# Altium PCB pcb.PcbDoc
Units mil, origin at the board's own origin, x right, y up, seen from the top; angles counter-clockwise.
Board outline 3149.61 x 1574.8 mil, 2 copper layers (Top Layer, Bottom Layer); 55 components, 39 nets, 228 pads, 50 vias.
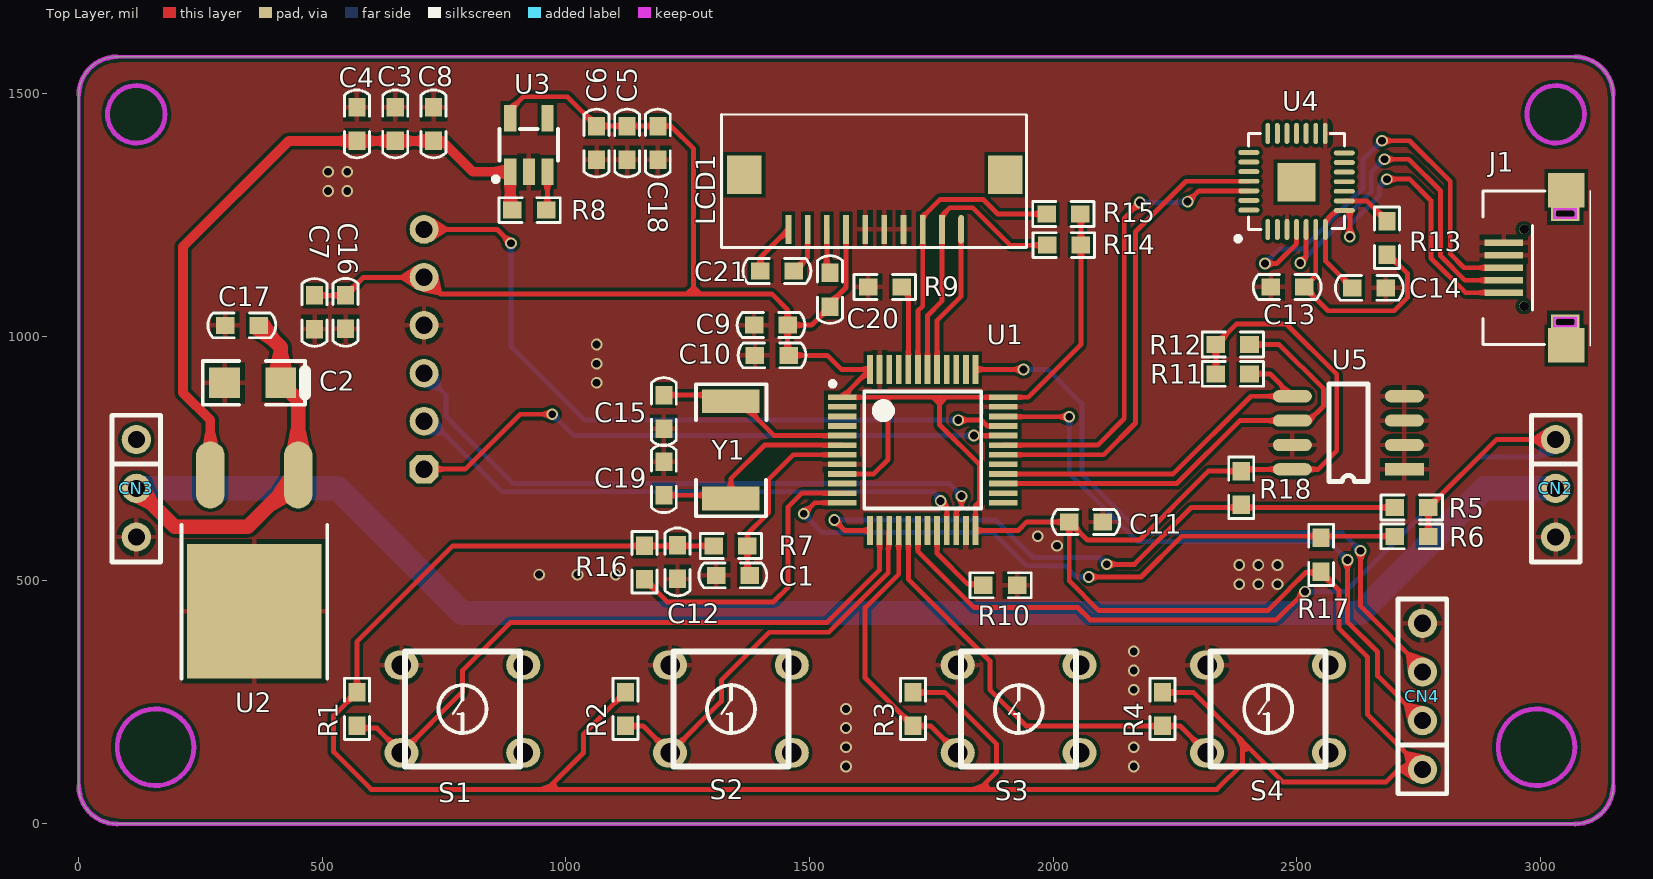
[diagram p0: Top Layer view]
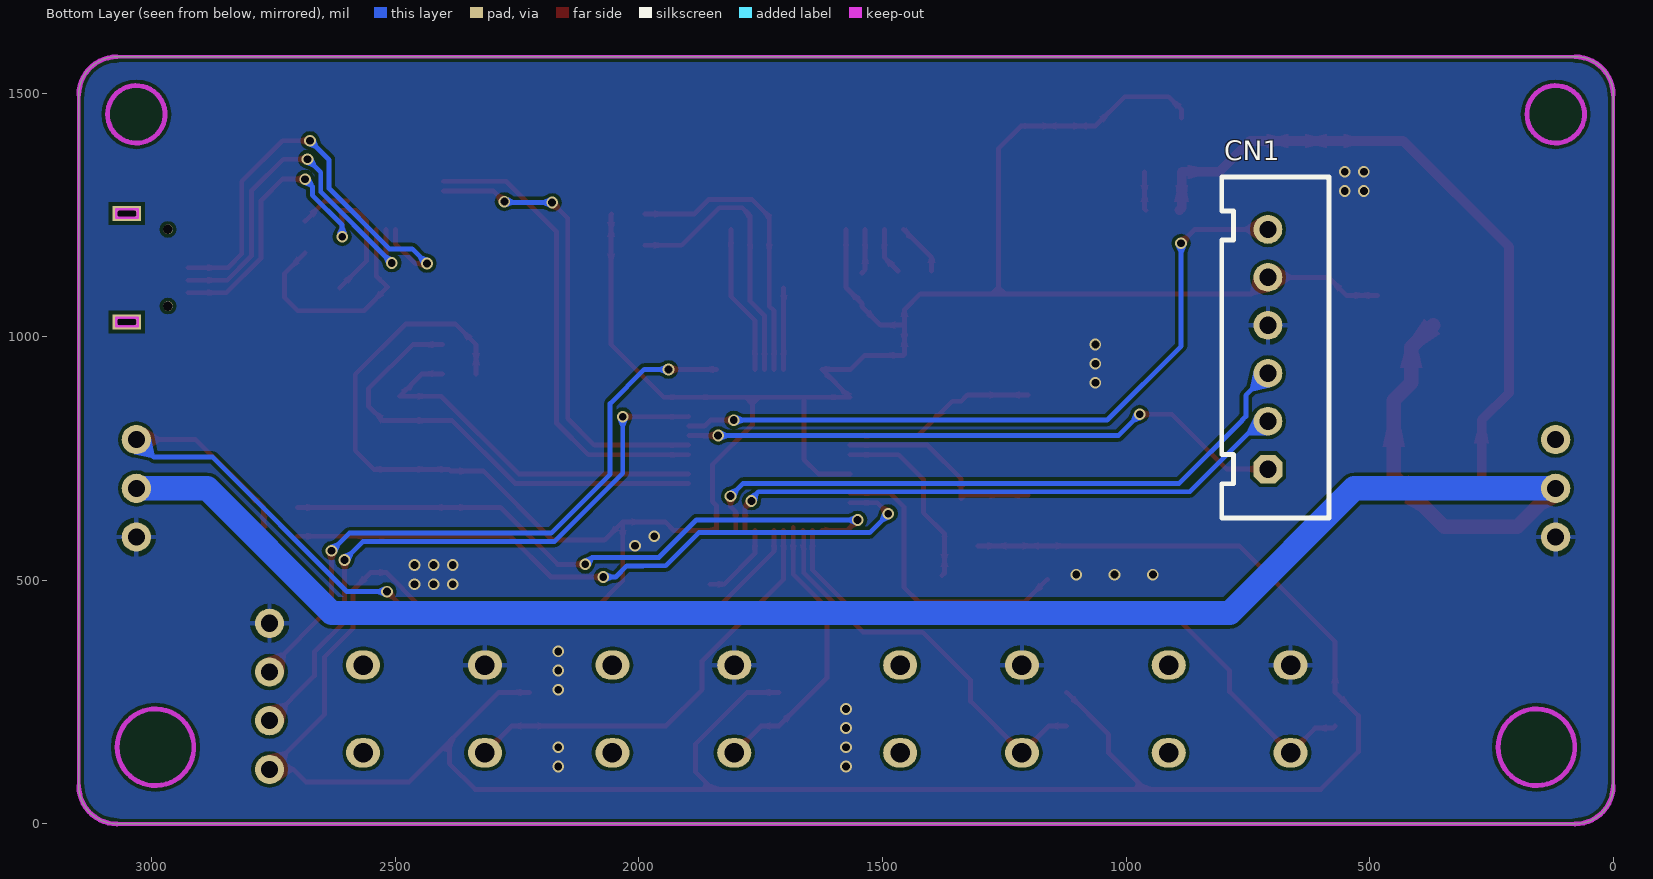
[diagram p1: Bottom Layer view, seen from below]
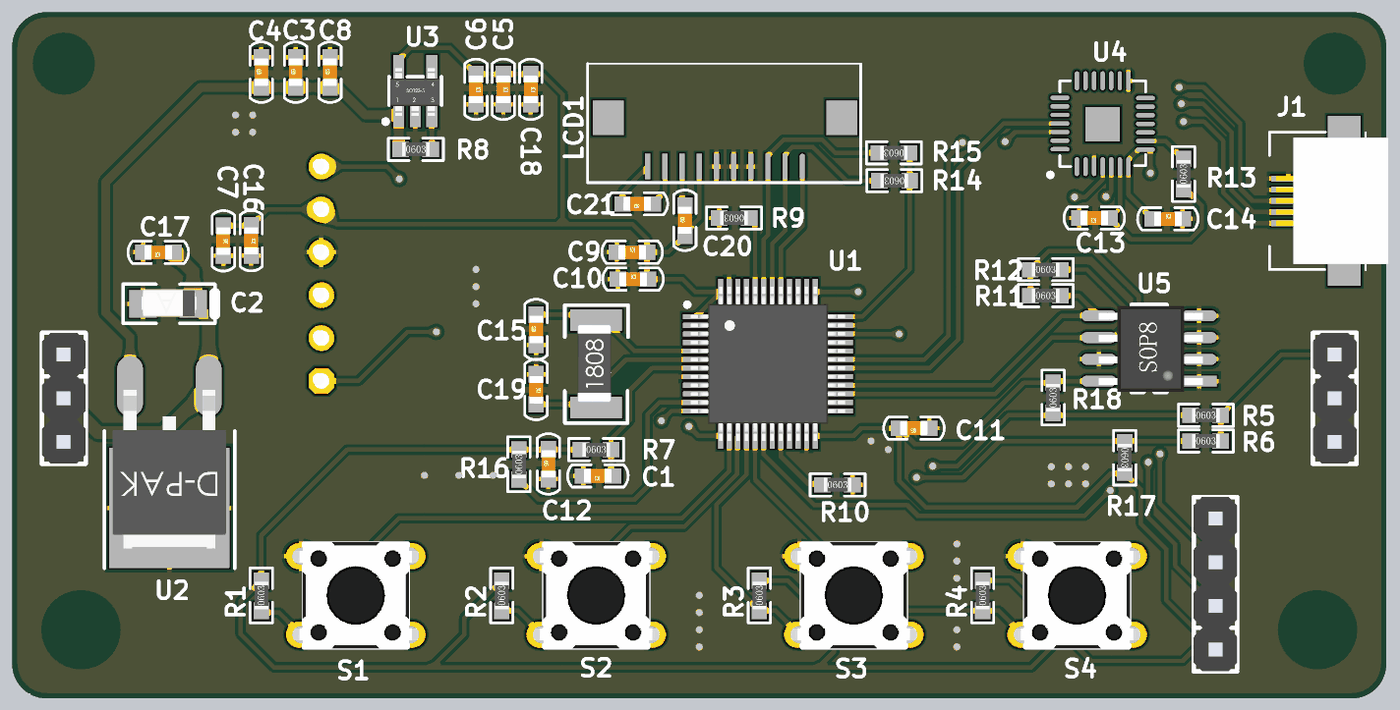
[diagram p2: 3D render of the assembled board from above, using the file's embedded part models]

## Layer stack, top to bottom
Top Solder: solder mask 0.4, Solder Resist, Dk 3.5
Top Layer: signal copper 1.4
Dielectric1: dielectric 12.6, FR-4, Dk 4.8
Bottom Layer: signal copper 1.4
Bottom Solder: solder mask 0.4, Solder Resist, Dk 3.5

## Board outline
0,78.74 ccw(c78.74,78.74) 78.74,0 3070.87,0 ccw(c3070.87,78.74) 3149.61,78.74 3149.61,1496.06 ccw(c3070.87,1496.06) 3070.87,1574.8 78.74,1574.8 ccw(c78.74,1496.06) 0,1496.06

## Design rules (kind name [scope] priority, off if disabled: settings)
Clearance [All] p1: gap=7
ComponentClearance [All] p1: gap=0 collisioncheckmode=3 verticalgap=0 showdistances=TRUE
PlaneConnect PlaneConnect_3 [InNet('VBAT')] p1: planeconnectstyle=Direct reliefexpansion=20 reliefentries=4 reliefconductorwidth=10 reliefairgap=10
PlaneConnect PlaneConnect_2 [InNet('GND')] p2: planeconnectstyle=Direct reliefexpansion=20 reliefentries=4 reliefconductorwidth=10 reliefairgap=10
PlaneConnect PlaneConnect_1 [InNet('VCC3V3')] p3: planeconnectstyle=Direct reliefexpansion=20 reliefentries=4 reliefconductorwidth=10 reliefairgap=10
PlaneConnect [All] p4: planeconnectstyle=Relief reliefexpansion=20 reliefentries=4 reliefconductorwidth=10 reliefairgap=10
PolygonConnect PolygonConnect_2 [IsVia] p1: connectstyle=Direct reliefconductorwidth=10 reliefentries=4 polygonreliefangle="90 Angle" airgapwidth=10
PolygonConnect PolygonConnect_1 [All vs InNet('VBAT')] p2: connectstyle=Direct reliefconductorwidth=10 reliefentries=4 polygonreliefangle="90 Angle" airgapwidth=10
PolygonConnect [All] p3: connectstyle=Relief reliefconductorwidth=10 reliefentries=4 polygonreliefangle="90 Angle" airgapwidth=10
RoutingVias [All] p1: holewidth=28 width=50 viastyle="Through Hole" minholewidth=16 minwidth=50 maxholewidth=28 maxwidth=50
SilkToSolderMaskClearance SilkscreenOverComponentPads [IsPad] p1: minsilkscreentomaskgap=10 clearancetoexposedcopper=TRUE
SolderMaskExpansion [All] p1: expansion=4
Width [All] p1: maxlimit=50 minlimit=10 preferedwidth=10
27 further rules are at their usual default settings.

## Components (designator, comment, footprint, x,y, rotation, side; value= is the part's Value field where it differs from the comment)
C1 "0.1uF" CAP-0603 1342.39,510.39 r180 top
C2 "10uF" CAP-A 354.33,905.51 r180 top
C3 "0.1uF" CAP-0603 649.61,1437.01 r90 top
C4 "0.1uF" CAP-0603 570.87,1437.01 r90 top
C5 "0.1uF" CAP-0603 1125.73,1397.64 r270 top
C6 "0.1uF" CAP-0603 1062.99,1397.64 r270 top
C7 "0.33uF" CAP-0603 334.65,1023.62 r180 top
C8 "0.1uF" CAP-0603 728.35,1437.01 r90 top
C9 "0.1uF" CAP-0603 1421,1024 r0 top
C10 "0.1uF" CAP-0603 1423,962 r0 top
C11 "0.1uF" CAP-0603 2067,620 r180 top
C12 "0.1uF" CAP-0603 1229,538 r90 top
C13 "0.1uF" CAP-0603 2480.32,1102.36 r180 top
C14 "0.1uF" CAP-0603 2648.98,1100.52 r0 top
C15 "22P" CAP-0603 1200.79,846.46 r90 top
C16 "0.1uF" CAP-0603 547.73,1050.3 r270 top
C17 "0.1uF" CAP-0603 484,1050 r270 top
C18 "0.1uF" CAP-0603 1188.47,1397.64 r270 top
C19 "22P" CAP-0603 1200.79,708.66 r270 top
C20 "0.1uF" CAP-0603 1542,1097 r90 top
C21 "1uF" CAP-0603 1433,1135 r180 top
CN1 "CN-6" CN-6 708.66,728.35 r90 bottom locked
CN2 "CN-3" IDC-3×1 3031.5,688.98 r90 top
CN3 "CN-3" IDC-3×1 118.11,688.98 r90 top
CN4 "CN-4" IDC-4×1 2758,112 r270 top
J1 "USB-micro" USB-MICRO 3031.5,1141.73 r90 top
LCD1 "LCD1602_I2C" LCD-IIC 1633.86,1417.32 r180 top locked
R1 "10K" RES-0603 570.87,236.22 r90 top
R2 "10K" RES-0603 1122.05,236.22 r90 top
R3 "10K" RES-0603 1712.6,236.22 r90 top
R4 "10K" RES-0603 2224.41,236.22 r90 top
R5 "120R" RES-0603 2736.22,649.61 r0 top
R6 "0R" RES-0603 2736.22,590.55 r0 top
R7 "10K" RES-0603 1338.58,570.87 r0 top
R8 "200K" RES-0603 925.2,1259.84 r0 top
R9 "10K" RES-0603 1654.54,1102.36 r180 top
R10 "10K" RES-0603 1892,490 r0 top
R11 "10K" RES-0603 2369,984 r0 top
R12 "10K" RES-0603 2369,924 r0 top
R13 "4.7K" RES-0603 2684.98,1203.52 r90 top
R14 "10K" RES-0603 2022,1188 r180 top
R15 "10K" RES-0603 2021,1252 r180 top
R16 "2K" RES-0603 1161.42,537.18 r90 top
R17 "3K" RES-0603 2550.09,552.24 r270 top
R18 "10K" RES-0603 2386.09,690.24 r90 top
S1 "KEY" KEY-6A 787.4,236.22 r0 top locked
S2 "KEY" KEY-6A 1338.58,236.22 r0 top locked
S3 "KEY" KEY-6A 1929.13,236.22 r0 top locked
S4 "KEY" KEY-6A 2440.94,236.22 r0 top locked
U1 "STM32F103C" LQFP-48 1732.28,767.72 r0 top locked
U2 "L7805" TO-252 360.33,531.5 r270 top
U3 "spx6205" SOT-23(5) 885.83,1338.58 r0 top
U4 "CP2102" QFN-28 2401.57,1417.32 r0 top
U5 "AT24C128" SOP-8(3.9) 2721,728 r180 top
Y1 "8MHZ" XTAL-2512 1338.58,767.72 r90 top

## Footprints (in the part's own frame and the unit in brackets; to place one, negate y for a bottom-side part, rotate by r counter-clockwise, add the part's x,y. Pads: shape width x height; smd on the part's side, far side on the other; paste and mask are expansions set on the pad)
CAP-0603 [mil]
  rect 38x35 smd: 1(-35,0) 2(34,0)
  silkscreen extent -70,-26 70,26, body extent -31,-16 32,16, height 12
CAP-A [mm]
  rect 1.6x1.6 smd: 1(-1.524,0) 2(1.397,0)
  silkscreen extent -2.79,-1.14 2.54,1.14, body extent -1.73,-0.84 1.47,0.76, height 1.6
CN-6 [mm]
  oct 1.5x1.5 hole 0.9: 1(0,0)
  round 1.5 hole 0.9: 2(2.5,0) 3(5,0) 4(7.5,0) 5(10,0) 6(12.5,0)
  silkscreen extent -2.54,-3.18 15.24,2.41, body extent -2.4,-1.77 15.1,2.03, height 6
IDC-3×1 [mil]
  round 60 hole 35: 1(100,0) 2(0,0) 3(-100,0)
  silkscreen extent -151,-50 150,50, body extent -150,-50 150,50, height 315
IDC-4×1 [mil]
  round 60 hole 35: 1(0,0) 2(-100,0) 3(-200,0) 4(-300,0)
  silkscreen extent -350,-50 50,50, body extent -350,-50 50,50, height 315
KEY-6A [mil]
  oval 70x60 hole 40: 1(-125,90) 2(-125,-90) 3(125,-90) 4(125,90)
  silkscreen extent -118,-118 118,118, body extent -153,-122 152,122, height 273
LCD-IIC [mm]
  rect 1.8x2 smd: 0(-6.8,2.15) 0(6.8,2.15)
  oval 0.3x1.5 smd: 1(-4.5,5)
  rect 0.3x1.5 smd: 2(-3.5,5) 3(-2.5,5) 4(-1.5,5) 5(-0.5,5) 6(0.5,5) 7(1.5,5) 8(2.5,5) 9(3.5,5) 10(4.5,5)
  silkscreen extent -7.92,-1 8,5.94
LQFP-48 [mm]
  rect 1.5x0.3 smd: 1(-4.2,2.75) 2(-4.2,2.25) 3(-4.2,1.75) 4(-4.2,1.25) 5(-4.2,0.75) 6(-4.2,0.25) 7(-4.2,-0.25) 8(-4.2,-0.75) 9(-4.2,-1.25) 10(-4.2,-1.75) 11(-4.2,-2.25) 12(-4.2,-2.75) 25(4.2,-2.75) 26(4.2,-2.25) 27(4.2,-1.75) 28(4.2,-1.25) 29(4.2,-0.75) 30(4.2,-0.25) 31(4.2,0.25) 32(4.2,0.75) 33(4.2,1.25) 34(4.2,1.75) 35(4.2,2.25) 36(4.2,2.75)
  rect 0.3x1.5 smd: 13(-2.75,-4.2) 14(-2.25,-4.2) 15(-1.75,-4.2) 16(-1.25,-4.2) 17(-0.75,-4.2) 18(-0.25,-4.2) 19(0.25,-4.2) 20(0.75,-4.2) 21(1.25,-4.2) 22(1.75,-4.2) 23(2.25,-4.2) 24(2.75,-4.2) 37(2.75,4.2) 38(2.25,4.2) 39(1.75,4.2) 40(1.25,4.2) 41(0.75,4.2) 42(0.25,4.2) 43(-0.25,4.2) 44(-0.75,4.2) 45(-1.25,4.2) 46(-1.75,4.2) 47(-2.25,4.2) 48(-2.75,4.2)
  silkscreen extent -4.82,-3.05 3.05,3.57, body extent -4.5,-4.5 4.5,4.5, height 1.2
QFN-28 [mil]
  rect 78.74x78.74 smd: 0(98,-100)
  oval 10x43.31 smd: 1(39,-197) 2(58.69,-197) 3(78.37,-197) 4(98.06,-197) 5(117.74,-197) 6(137.43,-197) 7(157.11,-197) 15(157,0) 16(137.32,0) 17(117.63,0) 18(97.94,0) 19(78.26,0) 20(58.57,0) 21(38.89,0)
  oval 43.31x10 smd: 8(196,-158) 9(196,-138.31) 10(196,-118.63) 11(196,-98.94) 12(196,-79.26) 13(196,-59.57) 14(196,-39.89) 22(0,-39) 23(0,-58.68) 24(0,-78.37) 25(0,-98.06) 26(0,-117.74) 27(0,-137.43) 28(0,-157.11)
  silkscreen extent -27,-221 197,0, body extent 1,-195 197,1, height 59
RES-0603 [mil] "1/10W"
  rect 38x35 smd: 1(-35,0) 2(34,0)
  silkscreen extent -63,-26 63,26, body extent -31,-16 31,16, height 18
SOP-8(3.9) [mil]
  rect 80x25 smd: 1(0,0)
  oval 80x25 smd: 2(0,-50) 3(0,-100) 4(0,-150) 5(230,-150) 6(230,-100) 7(230,-50) 8(230,0)
  silkscreen extent 75,-175 155,25, body extent -8,-173 230,25, height 63
SOT-23(5) [mil]
  rect 25x55 smd: 1(0,0) 2(38,0) 3(76,0) 4(76,110) 5(0,110)
  silkscreen extent -35,-20 98,88, body extent -20,-2 94,108, height 43
TO-252 [mm] "D-PAK  / SOT-428"
  oval 3.5x1.5 smd: 1(-4.699,2.286) 3(-4.699,-2.294)
  rect 7x7 smd: 2(2.405,-0.004)
  silkscreen extent -2.08,-3.79 5.92,3.81, body extent -4.47,-3.3 4.78,3.3, height 2.31
USB-MICRO [mm]
  rect 0.35x2 smd: 1(-1.3,2.7) 2(-0.65,2.7) 3(0,2.7) 4(0.65,2.7) 5(1.3,2.7)
  rect 1.8x1.9 smd: 6(-4.05,-0.55) 6(4.05,-0.55)
  rect 0.8x1.5 hole 0.4 slot 1 at 90 deg: 6(-2.825,-0.5) 6(2.825,-0.5)
  round 0.5 hole 0.5 unplated: ""(-2,1.65) ""(2,1.65)
  Keep-Out Layer lines w0.127: -3.054,0.075 -3.054,-1.043 -2.596,-1.043 -2.596,0.075 -3.054,0.075 ; 2.596,0.075 2.596,-1.043 3.054,-1.043 3.054,0.075 2.596,0.075
  silkscreen extent -4.05,-1.8 4,3.8, body extent -3.69,-3.1 3.69,3.4, height 3.3
XTAL-2512 [mm]
  rect 1.25x3 smd: 1(-2.54,0) 2(2.54,0)
  silkscreen extent -3.45,-1.85 3.43,1.83, body extent -2.24,-0.86 2.28,1.08, height 1

## Part data
C1 C3 C4 C5 C6 C7 C8 C9 C10 C11 C12 C13 C14 C15 C16 C17 C18 C19 C20 C21: library part CAP, "Capacitor"
C2: library part CAP(POL), "Polar Capacitor"
LCD1: "LCD1602"
R1 R2 R3 R4 R5 R6 R7 R8 R9 R10 R11 R12 R13 R14 R15 R16 R17 R18: library part RES, "Resistor"
U1: library part STM32F103C(LQFP)
U2: library part 78XX
U3: library part SP6205(FIXED)
U4: library part MPU6050_1
Y1: library part XTAL(1), "Crystal"

## Via types
v1: diameter 24, hole 16, Top Layer to Bottom Layer, tented both sides, 50 vias

## Nets (pads, with @x,y where several pads share a name; then routed paths per layer and width w, separated by ;. In a path a pad name is that pad's centre, name@x,y a point inside that pad or via, vN(x,y) a via of type N, cw(c..) or ccw(c..) an arc to the next point about the centre after c; other vN are vias at no path point)
ADC8: CN2.1 R5.2 R6.2 U1.18 | length 1941.4
  Top Layer w10: U1.18 1722.44,559.56 1838,444 2051,444 2076,419 2458,419 2516,477 v1(2517,477) ; R6.2 R5.2 2909.59,788.98 CN2.1
  Bottom Layer w10: v1(2517,477) 2599,477 2875,753 2995.52,753 CN2.1
BLE-KEY: CN1.6 U1.33 | length 1479.7
  Top Layer w10: CN1.6 858.53,1220.47 v1(887,1192) ; v1(1805,829) 1852.85,829 1864.92,816.93 U1.33
  Bottom Layer w10: v1(887,1192) 887,981 1039,829 v1(1805,829)
BLE-RX: CN1.2 U1.21 | length 1197.3
  Top Layer w10: v1(1769,663) 1782,650 1782,602.87 U1.21
  Bottom Layer w10: CN1.2 724.23,826.77 869,682 1755,682 1769,668 v1(1769,663)
BLE-S: CN1.1 U1.32 | length 1253.8
  Top Layer w10: CN1.1 793.35,728.35 906,841 v1(972,841) ; v1(1837.24,797.24) U1.32
  Bottom Layer w10: v1(972,841) 1015.76,797.24 v1(1837.24,797.24)
BLE-TX: CN1.3 U1.22 | length 1308.6
  Top Layer w10: U1.22 1801.18,641.18 1812,652 v1(1812,673)
  Bottom Layer w10: CN1.3 754,879.86 754,836.78 762.05,828.72 762.05,827.95 891,699 1786,699 v1(1812,673)
BOOT0: R9.1 U1.44 | length 167.7
  Top Layer w10: U1.44 R9.1@1702.76,1100.76
BOOT1: R10.1 U1.20 | length 165.5
  Top Layer w10: U1.20 1761.81,555.19 1824.87,492.13 R10.1@1854,492.13
CP2102-RX: U1.30 U4.25 | length 966.4
  Top Layer w10: U1.30 2103.87,757.87 2169,823 2169,1215.54 2272.73,1319.27 U4.25
CP2102-TX: U1.31 U4.26 | length 961.6
  Top Layer w10: U1.31 2091.22,777.56 2146,832.34 2146,1243.58 v1(2177.98,1275.56) ; v1(2275.98,1277.52) 2276.98,1277.52 2299.05,1299.58 U4.26
  Bottom Layer w10: v1(2177.98,1275.56) 2275.03,1275.56 2275.98,1276.52 v1(2275.98,1277.52)
EE-SCL: R11.2 U1.27 U5.6 | length 948
  Top Layer w10: U1.27 2253.82,698.82 2383,828 U5.6 2525,828 2555,858 2555,893 2464,984 R11.2
EE-SDA: R12.2 U1.28 U5.5 | length 766.5
  Top Layer w10: U1.28 2246.5,718.5 2406,878 U5.5 2445,924 R12.2
GND: C1.2 C2.2 C3.2 C4.2 C5.2 C6.2 C7.2 C8.2 C9.1 C10.1 C11.1 C12.1 C13.2 C14.2 C15.1 C16.2 C17.2 C18.2 C19.1 CN1.4 CN2.3 CN3.3 CN4.4 J1.4 J1.5 LCD1.4 LCD1.5 LCD1.6 R9.2 R10.2 S1.1 S2.1 S3.1 S4.1 U1.8 U1.23 U1.35 U1.47 U2.2 U3.2 U4.3 U4.15 U5.1 U5.2 U5.3 U5.4 U5.7
  other v1: 1574.8,118.11 2165.35,118.11 1574.8,157.48 2165.35,157.48 1574.8,196.85 1574.8,236.22 2165.35,275.59 2165.35,314.96 2165.35,354.33 2381.89,492.13 2421.26,492.13 2460.63,492.13 944.88,511.81 1023.62,511.81 1102.36,511.81 2381.89,531.5 2421.26,531.5 2460.63,531.5 2008,571 1968.5,590.55 1062.99,905.51 1062.99,944.88 1062.99,984.25 511.81,1299.21 551.18,1299.21 511.81,1338.58 551.18,1338.58
KEY1: R1.1 S1.2 U1.14 | length 1357.5
  Top Layer w10: R1.1 575.24,196.85 611.77,196.85 S1.2 787.4,271.22 787.4,314.96 885.83,413.39 1535.43,413.39 1643.7,521.65 U1.14
KEY2: R2.1 S2.2 U1.15 | length 828.5
  Top Layer w10: R2.1 1158.58,201.22 S2.2 1318.9,251.54 1318.9,295.28 1417.32,393.7 1539.79,393.7 1661.61,515.52 1661.61,600.58 U1.15
KEY3: R3.1 S3.2 U1.16 | length 590.9
  Top Layer w10: U1.16@1683.07,608.46 U1.16 1683.07,512.94 1614.17,444.04 1614.17,299.65 R3.1 1749.13,201.22 S3.2
KEY4: R4.1 S4.2 U1.17 | length 895.5
  Top Layer w10: U1.17 1702.76,501.97 1870.08,334.65 1870.08,275.59 1944.45,201.22 R4.1 2260.94,201.22 S4.2
LCD-RESET: LCD1.1 U1.41 | length 307.8
  Top Layer w10: U1.41 1761.81,1033.81 1811.02,1083.02 LCD1.1
LCD-SCL: LCD1.2 R14.2 U1.42 | length 582.8
  Top Layer w10: U1.42 1742.13,1043.42 1771.65,1072.95 LCD1.2 1771.65,1248.65 1788,1265 1835,1265 1912,1188 R14.2
LCD-SDA: LCD1.3 R15.2 U1.43 | length 599.2
  Top Layer w10: U1.43 1722.44,1053.15 1732.28,1062.99 LCD1.3 1732.28,1246.28 1768,1282 1856,1282 1886,1252 R15.2
NetC1_1: C1.1 R7.2 U1.7 | length 388.8
  Top Layer w10: C1.1 1372.58,515.2 R7.2 1372.58,595.58 1416,639 1416,707.34 1466.54,757.87 U1.7
NetC13_1: C13.1 R13.1 U4.6 | length 481.1
  Top Layer w10: U4.6 2539,1124.54 2516.83,1102.36 C13.1 2564.16,1053.52 2699.98,1053.52 2726.98,1080.52 2726.98,1130.52 R13.1@2684.98,1172.52
NetC20_2: C20.2 LCD1.8 | length 92.2
  Top Layer w10: LCD1.8 1535.43,1137.57 C20.2
NetC21_1: C21.1 LCD1.9 | length 97.1
  Top Layer w10: C21.1 1496.06,1163.06 LCD1.9
NetC21_2: C21.2 LCD1.10 | length 109.4
  Top Layer w10: C21.2 1399,1162.78 LCD1.10
NetJ1_2: J1.2 U4.5 | length 784.9
  Top Layer w10: v1(2506.98,1151.52) 2519.32,1163.85 U4.5 ; v1(2679.98,1364.52) 2729.97,1364.52 2795.28,1299.21 2795.28,1165.77 2844.91,1116.14 J1.2
  Bottom Layer w10: v1(2506.98,1151.52) 2518.98,1163.52 ; 2519.03,1163.52 2652.98,1297.48 2652.98,1337.52 v1(2679.98,1364.52)
NetJ1_3: J1.3 U4.4 | length 935
  Top Layer w10: v1(2434.98,1150.52) 2458.98,1150.52 2499.63,1191.17 U4.4 ; v1(2674.98,1402.52) 2731.34,1402.52 2814.96,1318.9 2814.96,1170.13 2843.36,1141.73 J1.3
  Bottom Layer w10: v1(2434.98,1150.52) 2464.98,1180.52 2511.98,1180.52 2635.98,1304.52 2635.98,1363.52 v1(2674.98,1402.52)
NetR8_2: R8.2 U3.3 | length 79.8
  Top Layer w10: R8.2 961.83,1262.47 U3.3
NetR13_2: R13.2 U4.9 | length 104.6
  Top Layer w10: U4.9 2643.5,1279.01 R13.2
NetR16_1: R16.1 U1.11 | length 613.7
  Top Layer w10: R16.1 1207.6,456 1426,456 1456,486 1456,651 1484.13,679.13 U1.11
OSCIN: C15.2 U1.5 Y1.2 | length 400.6
  Top Layer w10: C15.2 1325.84,880.46 Y1.2 1356.69,867.72 1427.17,797.24 U1.5
OSCOUT: C19.2 U1.6 Y1.1 | length 438.5
  Top Layer w10: C19.2 1331.64,674.66 Y1.1 1338.58,708.66 1407.48,777.56 U1.6
SWCLK: CN4.3 U1.37 | length 1328.5
  Top Layer w10: U1.37 v1@1935,933.07 ; v1(2631,561) 2631,447 2758,320 CN4.3
  Bottom Layer w10: v1(1939,933) 1989,933 2059,863 2059,718.04 2180.04,597 2594,597 2631,560 v1(2631,561)
SWDIO: CN4.2 U1.34 | length 1290.1
  Top Layer w10: U1.34 1898.25,836 v1(2033,836) ; v1(2604,542) 2604,415 2666,353 2666,304 CN4.2
  Bottom Layer w10: v1(2033,836) 2033,720 2173,580 2566,580 v1(2604,542)
U2-RX: R5.1 R18.1 U1.13 | length 1318.2
  Top Layer w10: v1(1551,624) 1572.64,602.36 U1.13 ; v1(2110,533) 2166.86,533 2283.46,649.61 R5.1
  Bottom Layer w10: v1(1551,624) 1882,624 1959,547 2096,547 v1(2110,533)
U2-TX: R6.1 R17.1 U1.12 | length 1390.5
  Top Layer w10: v1(1488,637) 1510.45,659.45 U1.12 ; v1(2073,507) 2180.23,507 2263.78,590.55 R6.1
  Bottom Layer w10: v1(1488,637) 1488,636 1526,598 1877,598 1945,530 1990.76,530 1990.89,529.87 2024.86,529.87 2047.72,507 v1(2073,507)
VBUS: C14.1 J1.1 U4.7 U4.8 | length 828.2
  Top Layer w10: v1(2608.98,1205.52) 2608.98,1259.32 U4.8 2580.79,1259.32 2558.69,1237.22 U4.7 2558.69,1155.82 C14.1 ; v1(2684.98,1323.52) 2731.6,1323.52 2775.59,1279.53 2775.59,1161.42 2846.46,1090.55 J1.1
  Bottom Layer w10: v1(2608.98,1205.52) 2608.98,1229.44 2669.98,1290.44 2669.98,1308.52 v1(2684.98,1323.52)
VCC3V3: C5.1 C6.1 C9.2 C10.2 C11.2 C12.2 C16.1 C17.1 C18.1 C20.1 CN1.5 CN4.1 LCD1.7 R1.2 R2.2 R3.2 R4.2 R7.1 R11.1 R12.1 R14.1 R15.1 R16.2 R17.2 R18.2 U1.1 U1.9 U1.24 U1.36 U1.48 U3.5 U5.8 | length 10525.5
  Top Layer w10: C17.1 547.43,1085 C16.1 584.48,1122.05 CN1.5 742.71,1088 1422,1088 1455,1055 C9.2 ; U3.5 885.83,1466.16 912.45,1492.78 1002.85,1492.78 C6.1 1215.36,1432.64 1262,1386 1262,1088 ; R2.2 1036,184.17 1036,146 961,71 ; R7.1 767.72,570.87 570.87,374.02 R1.2 523,222.35 523,148 600,71 961,71 ; U1.9 1631.5,718.5 1661,748 1661,872.98 1658,875.98 ; LCD1.7 1574.8,1101.2 1542,1068.39 C20.1 1504,1024 C9.2 ; R3.2 1777.78,270.22 1884,164 1884,107 1848,71 ; R15.1 2057,1251 R14.1 2057,984 1948.98,875.98 U1.36 1767,875.98 ; R4.2 2287.78,270.22 2389,169 ; R12.1 R11.1 2376,1026 2479,1026 2582,923 2582,766 2544,728 U5.8 2389.85,728 R18.2 2318.73,724.24 2177.49,583 2070,583 C11.2 ; 961,71 1848,71 ; C9.2 1455,964 C10.2 1536,962 1564.93,933.07 U1.48 U1.1 1658,875.98 ; 1658,875.98 1767,875.98 ; 1767,875.98 1767,819 1849,737 1849,662 1840.55,653.55 U1.24 1928.36,602.36 1946,620 C11.2 ; 1848,71 2336,71 2389,124 2389,169 ; C11.2 2033,499 2094,438 2440.44,438 2484.63,482.18 2484.63,482.63 2518.24,516.24 2550.09,516.24 2587,479.34 2587,401 2645,343 2645,225 CN4.1 2709,112 2683,86 2472,86 2389,169
VCC5.0: C3.1 C4.1 C8.1 R8.1 U2.3 U3.1 | length 1360.2
  Top Layer w20: U2.3 270.02,828.98 214,885 214,1185 431.01,1402.01 C4.1 C3.1 C8.1 745.99,1402.01 809.42,1338.58 U3.1 885.83,1264.21 R8.1
VCC5.0-8.4: C2.1 C7.1 CN2.2 CN3.2 U2.1 | length 3876.9
  Top Layer w30: CN3.2 197.09,610 347,610 450.33,713.33 U2.1 450.33,869.51 C2.1 414.33,978.94 C7.1
  Bottom Layer w50: CN3.2 531.5,688.98 787.47,433 2630,433 2885.98,688.98 CN2.2
pads on no net: CN3.1 J1. J1.6 LCD1.0 S1.3 S1.4 S2.3 S2.4 S3.3 S3.4 S4.3 S4.4 U1.2 U1.3 U1.4 U1.10 U1.19 U1.25 U1.26 U1.29 U1.38 U1.39 U1.40 U1.45 U1.46 U3.4 U4.0 U4.1 U4.2 U4.10 U4.11 U4.12 U4.13 U4.14 U4.16 U4.17 U4.18 U4.19 U4.20 U4.21 U4.22 U4.23 U4.24 U4.27 U4.28

## Polygon pours and split planes (outlines as drawn)
GND on Top Layer "GND_L01_P000" (solid, remove dead copper, pour order 0): 0,0 3149.61,0 3149.61,1574.8 0,1574.8
GND on Bottom Layer "GND_L02_P002" (solid, remove dead copper, pour order 2): 0,0 3149.61,0 3149.61,1574.8 0,1574.8

## Keep-outs
Keep-Out Layer:
  circle w10: c157.48,157.48 r78.74
  circle w10: c2992.13,157.48 r78.74
  circle w10: c3031.5,1456.69 r59.06
  circle w10: c118.11,1456.69 r59.06
  lines w7.87: 0,78.74 0,1496.06 ; 78.74,0 3070.87,0 ; 78.74,1574.8 3070.87,1574.8 ; 3149.61,78.74 3149.61,1496.06
  lines w10: 0,78.74 ccw(c78.74,78.74) 78.74,0 ; 0,1496.06 cw(c78.74,1496.06) 78.74,1574.8 ; 3070.87,0 ccw(c3070.87,78.74) 3149.61,78.74 ; 3070.87,1574.8 cw(c3070.87,1496.06) 3149.61,1496.06

## Text inside footprints (layer, text, board x,y; h text height)
U1: Mechanical 15 "1" at 1725.82,750 h29.53